# Altium PCB Board_LRA_Altium.pcbdoc
Units mm, origin at the board's own origin, x right, y up, seen from the top; angles counter-clockwise.
Board outline 54.78 x 49.37 mm, 2 copper layers (Top Layer, Bottom Layer); 19 components, 15 nets, 57 pads, 17 vias.
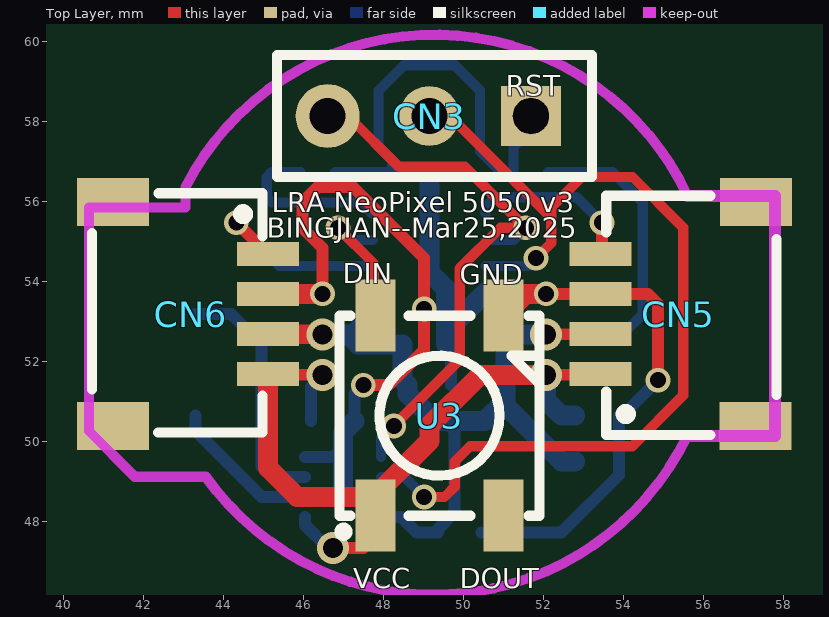
[diagram p0: Top Layer view]
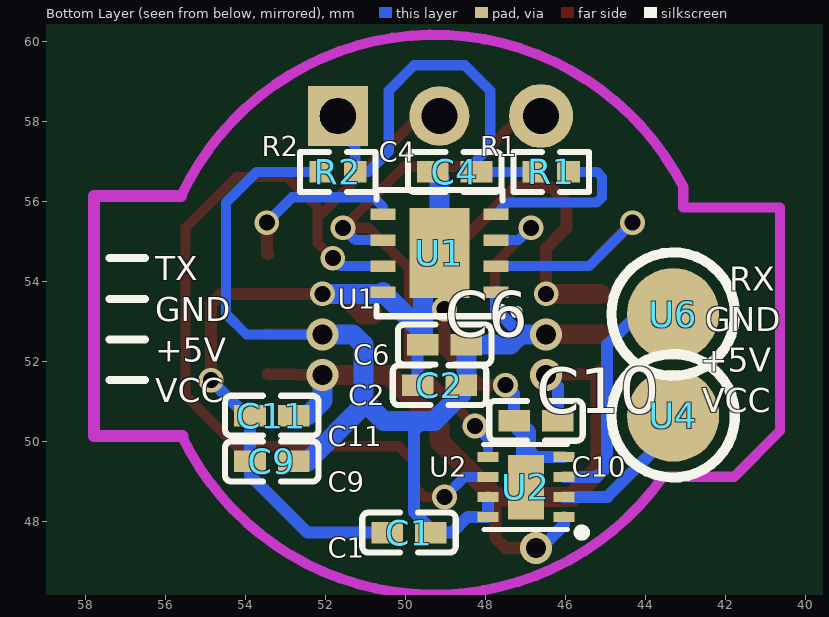
[diagram p1: Bottom Layer view, seen from below]

## Layer stack, top to bottom
Top Layer: signal copper (thickness not stored)
Dielectric: dielectric 0.32, FR-4, Dk 4.8
Bottom Layer: signal copper (thickness not stored)

## Board outline
80.177,25.4 25.4,25.4 25.4,74.771 80.177,74.771

## Components (designator, comment, footprint, x,y, rotation, side; value= is the part's Value field where it differs from the comment)
C1 "1uF" C0402 49.911,47.721 r0 bottom
C2 "100nF" C0402_NEW 49.149,51.404 r180 bottom
C4 "100nF" C0402_NEW 48.768,56.738 r0 bottom
C6 "C0402" C0402 49.022,52.42 r0 bottom
C9 "C0402" C0402 53.34,49.499 r0 bottom
C10 "C0402" C0402 46.736,50.515 r0 bottom
C11 "C0402" C0402 53.34,50.642 r0 bottom
CN3 "3 Pads Solder" 3PADS-JED 49.149,58.135 r270 top
CN5 "SM04B-SRSS-TB (LF)(SN)" CONN-SMD_4P-P1.00_SM04B-SRSS-TB-LF-SN 55.372,53.182 r90 top
CN6 "SM04B-SRSS-TB (LF)(SN)" CONN-SMD_4P-P1.00_SM04B-SRSS-TB-LF-SN 43.18,53.182 r270 top
R1 "300Ω" R0402 46.355,56.738 r0 bottom
R2 "10kΩ" R0402 51.689,56.738 r180 bottom
U1 "PIC16F18313-E/RF" DFN-8_L3.0-W3.0-P0.65-BL-EP 49.149,54.706 r270 bottom
U2 "DRV8837DSGR" WSON-8_L2.0-W2.0-P0.50-TL-EP 46.99,48.864 r180 bottom
U3 "LED-SMD_4P-L5.0-W5.0-TL-2" LED-SMD_4P-L5.0-W5.0-TL-2 49.403,50.642 r90 top
U4 "CONN-SMD_YTC1P-3015-01" CONN-SMD_YTC1P-3015-01 43.307,50.642 r0 bottom
U6 "CONN-SMD_YTC1P-3015-01" CONN-SMD_YTC1P-3015-01 43.307,53.182 r0 bottom
? "" ? 49.276,41.527 r0 top
? "" ? 63.622,53.119 r0 top

## Footprints (in the part's own frame and the unit in brackets; to place one, negate y for a bottom-side part, rotate by r counter-clockwise, add the part's x,y. Pads: shape width x height; smd on the part's side, far side on the other; paste and mask are expansions set on the pad)
3PADS-JED [mm]
  rect 1.5x1.5 hole 0.9 slot 0.9 at 0 deg paste+0 mask+0.102: 1(0,2.54)
  round 1.5 hole 0.9 paste+0 mask+0.102: 2(0,0)
  round 1.6 hole 0.9 paste+0 mask+0.102: 3(0,-2.54)
  silkscreen extent -1.52,-3.81 1.52,4.06
C0402 [mm]
  rect 0.79x0.54 smd paste-100 mask+0.051: 1(0.545,0) 2(-0.545,0)
  silkscreen extent -1.17,-0.5 1.17,0.5
C0402_NEW [mm]
  rect 0.79x0.54 smd paste-100 mask+0.051: 1(0.545,0) 2(-0.545,0)
  silkscreen extent -1.17,-0.5 1.17,0.5
CONN-SMD_4P-P1.00_SM04B-SRSS-TB-LF-SN [mm]
  rect 0.6x1.55 smd paste+0 mask+0.051: 1(-1.5,1.938) 2(-0.5,1.938) 3(0.501,1.938) 4(1.5,1.938)
  rect 1.2x1.8 smd paste+0 mask+0.051: 5(2.8,-1.938) 6(-2.8,-1.938)
  silkscreen extent -3.02,-2.46 2.96,1.8
CONN-SMD_YTC1P-3015-01 [mm]
  round 2.3 smd paste+0 mask+0.05: 1(0,0)
  silkscreen extent -1.54,-1.54 1.55,1.54
DFN-8_L3.0-W3.0-P0.65-BL-EP [mm]
  rect 0.28x0.625 smd paste+0 mask+0.051: 1(0.975,1.412) 2(0.325,1.412) 3(-0.325,1.412) 4(-0.975,1.412) 5(-0.975,-1.412) 6(-0.325,-1.412) 7(0.325,-1.412) 8(0.975,-1.412)
  rect 2.25x1.5 smd paste+0 mask+0.051: 9(0,0)
  silkscreen extent -1.58,-1.58 1.58,2.01
LED-SMD_4P-L5.0-W5.0-TL-2 [mm]
  rect 1.8x1 smd paste+0 mask+0.051: 1(2.5,-1.6) 2(2.5,1.6) 3(-2.5,1.6) 4(-2.5,-1.6)
  silkscreen extent -3,-2.5 2.5,2.5
R0402 [mm]
  rect 0.566x0.54 smd paste-100 mask+0.051: 1(0.433,0) 2(-0.433,0)
  silkscreen extent -0.94,-0.5 0.94,0.5
WSON-8_L2.0-W2.0-P0.50-TL-EP [mm]
  rect 0.521x0.25 smd paste+0 mask+0.051: 1(0.95,-0.75) 2(0.95,-0.25) 3(0.95,0.25) 4(0.95,0.75) 5(-0.95,0.75) 6(-0.95,0.25) 7(-0.95,-0.25) 8(-0.95,-0.75)
  rect 0.902x1.613 smd paste+0 mask+0.051: 9(0,-0.013)
  silkscreen extent -1.06,-1.22 1.47,1.06
? [mm]

## Via types
v1: diameter 0.62, hole 0.4, Top Layer to Bottom Layer, tented both sides, 12 vias
v2: diameter 0.8, hole 0.5, Top Layer to Bottom Layer, tented both sides, 5 vias

## Nets (pads, with @x,y where several pads share a name; then routed paths per layer and width w, separated by ;. In a path a pad name is that pad's centre, name@x,y a point inside that pad or via, vN(x,y) a via of type N, cw(c..) or ccw(c..) an arc to the next point about the centre after c; other vN are vias at no path point)
+5V: C1.2 C2.1 C6.2 C9.2 CN5.2 CN6.3 R2.2 U1.1 U2.7 U2.8 | length 28.5
  Top Layer w0.3: v2(52.07,52.674) CN5.2
  Top Layer w0.5: CN6.3 v2(46.482,52.674)
  Bottom Layer w0.254: v2(52.07,52.674) 53.975,52.674 54.483,53.182 54.483,55.976 53.721,56.738 R2.2
  Bottom Layer w0.3: 47.117,52.674 47.737,53.293 U1.1 ; U2.7 47.94,48.114 48.44,48.114 48.833,47.721 C1.2 ; C1.2 49.365,47.81 49.784,48.229 49.784,50.251 49.53,50.515
  Bottom Layer w0.5: v2(46.482,52.674) 47.117,52.674 47.371,52.42 C6.2 48.477,51.531 C2.1 48.604,51.187 49.276,50.515 50.546,50.515 51.054,51.023 51.054,52.42 51.308,52.674 v2(52.07,52.674) ; 51.054,50.896 52.451,49.499 C9.2
DIN: U1.3 U3.2 | length 3.6
  Top Layer w0.254: v1(46.863,55.341) 47.758,54.446 U3.2@47.758,53.164
  Bottom Layer w0.254: v1(46.863,55.341) 47.173,55.031 U1.3
DOUT: U3.4
GND: C1.1 C2.2 C4.1 C6.1 C9.1 C10.1 C11.1 CN5.3 CN6.2 U1.8 U1.9 U2.4 U2.9 U3.1 | length 38.4
  Top Layer w0.3: v1(46.482,53.69) 46.482,54.833 45.974,55.341 45.974,55.976 46.355,56.357 47.244,56.357 49.022,54.579 v1(49.022,53.309) 49.022,52.293 48.133,51.404 v1(47.498,51.404) ; v1(52.07,53.69) CN5.3 54.618,53.682 54.864,53.436 v1(54.864,51.531)
  Top Layer w0.5: CN6.2 v1(46.482,53.69) ; U3.1@50.813,53.177 51.049,53.177 51.562,53.69 v1(52.07,53.69)
  Bottom Layer w0.3: U2.4 46.744,49.614 46.99,49.86 ; C10.1 47.281,51.187 v1(47.498,51.404) ; v1(49.022,53.309) 49.496,53.309 49.567,53.238 ; C6.1 49.694,52.293 C2.2 ; C1.1 52.451,47.721 53.886,49.156 C9.1 ; C9.1 C11.1 53.975,50.642 v1(54.864,51.531)
  Bottom Layer w0.5: U2.9 46.99,50.224 C10.1 ; C4.1 49.149,56.574 U1.9 49.149,54.235 49.567,53.817 C6.1 49.567,52.737 U1.8 50.603,53.69 v1(52.07,53.69)
OUT1: U2.2 U4.1 | length 3.8
  Bottom Layer w0.3: U4.1 43.307,50.261 44.954,48.614 U2.2
OUT2: U2.3 U6.1 | length 6.2
  Bottom Layer w0.3: U6.1 44.196,53.182 44.958,52.42 44.958,49.372 45.216,49.114 U2.3
RA0: CN3.2 U1.7 U2.6 | length 24.4
  Top Layer w0.254: v1(49.022,48.61) 49.53,48.61 49.784,48.864 49.784,49.499 50.165,49.88 54.229,49.88 55.499,51.15 55.499,55.341 54.229,56.611 52.959,56.611 52.197,55.849 52.197,55.595 ; CN3.2 49.657,58.135 52.197,55.595 ; v1(51.816,54.579) 52.197,54.96 52.197,55.595
  Bottom Layer w0.254: U2.6 48.518,49.114 v1(49.022,48.61) ; U1.7 51.618,54.381 v1(51.816,54.579)
RA1: CN3.3 U1.6 U2.5 | length 14.8
  Top Layer w0.254: CN3.3 47.117,58.135 48.387,56.865 50.038,56.865 v1(51.562,55.341) 50.927,55.341 49.911,54.325 49.911,52.039 v1(48.26,50.388)
  Bottom Layer w0.254: U2.5 47.94,50.068 v1(48.26,50.388) ; U1.6 51.252,55.031 v1(51.562,55.341)
RST: R1.2 U1.4 | length 4.2
  Bottom Layer w0.254: R1.2 45.212,56.738 45.085,56.611 45.085,56.103 45.212,55.976 47.442,55.976 U1.4
RX: CN6.1 U1.2 | length 5
  Top Layer w0.3: v1(44.323,55.468) 44.332,55.468 CN6.1
  Bottom Layer w0.254: v1(44.323,55.468) 45.41,54.381 U1.2
S$9886: 
S$15369: 
SW: C4.2 CN3.1 R1.1 R2.1 | length 10.8
  Bottom Layer w0.254: R1.1 C4.2 ; C4.2 48.222,57.03 47.879,57.373 47.879,58.77 48.514,59.405 49.784,59.405 50.419,58.77 50.419,57.246 50.927,56.738 R2.1 ; R2.1 51.256,57.373 51.689,57.806 CN3.1
TX: CN5.4 U1.5 | length 4.2
  Top Layer w0.3: CN5.4@53.434,54.683 53.467,54.716 v1(53.467,55.468)
  Bottom Layer w0.254: U1.5 50.561,55.864 50.8,56.103 52.832,56.103 v1(53.467,55.468)
VCC: C10.2 C11.2 CN5.1 CN6.4 U2.1 U3.3 | length 19.9
  Top Layer w0.3: CN6.4 v2(46.482,51.658) ; v2(46.736,47.34) 47.498,47.34 47.752,47.594 U3.3@47.752,48.61 ; v2(52.07,51.658) CN5.1
  Top Layer w0.5: CN6.4 45.118,49.339 45.847,48.61 47.752,48.61 49.149,50.007 49.149,50.388 50.419,51.658 v2(52.07,51.658)
  Bottom Layer w0.3: U2.1 46.04,47.909 46.609,47.34 v2(46.736,47.34) ; C10.2 46.191,51.367 v2(46.482,51.658)
  Bottom Layer w0.5: v2(52.07,51.658) 52.07,51.023 52.451,50.642 C11.2
pads on no net: CN5.5 CN5.6 CN6.5 CN6.6

## Polygon pours and split planes (outlines as drawn)
GND on Bottom Layer (solid): 39.497,60.802 58.801,60.802 59.309,60.294 59.309,44.038 58.801,43.53 40.005,43.53 39.37,44.165
VCC on Top Layer (solid): 38.1,61.183 59.182,61.183 59.69,60.675 59.69,44.038 58.928,43.276 39.116,43.276 38.227,44.165

## Keep-outs
Keep-Out Layer:
  lines w0.254 net S$9886: 43.054,56.357 cw(c49.276,53.182) 55.608,56.131 ; 43.561,49.118 ccw(c49.276,53.182) 55.588,50.127

## Silkscreen, mask and mechanical layers (free items; w line width, h text height)
Top Overlay:
  text "RST" at 51.054,58.643 h0.51
  text "LRA NeoPixel 5050 v3" at 45.212,55.726 h0.5
  text "BINGJIAN--Mar25,2025" at 45.085,55.091 h0.5
  text "DIN" at 46.99,53.948 h0.5
  text "GND" at 49.911,53.929 h0.5
  text "VCC" at 47.244,46.328 h0.5
  text "DOUT" at 49.911,46.328 h0.5
Bottom Overlay:
  lines w0.2 net S$15369: 56.515,51.531 57.404,51.531 ; 56.515,52.547 57.404,52.547 ; 56.515,53.563 57.404,53.563 ; 56.515,54.579 57.404,54.579
  text "R1" at 48.133,57.123 h0.5
  text "R2" at 53.594,57.123 h0.5
  text "C4" at 50.673,56.996 h0.5
  text "TX" at 56.261,54.025 h0.6
  text "RX" at 41.91,53.771 h0.6
  text "U1" at 51.689,53.313 h0.5
  text "GND" at 56.261,53.009 h0.6
  text "GND" at 42.499,52.755 h0.6
  text "+5V" at 56.261,51.993 h0.6
  text "C6" at 51.308,51.916 h0.5
  text "+5V" at 42.635,51.739 h0.6
  text "VCC" at 56.261,50.977 h0.6
  text "C2" at 51.435,50.9 h0.5
  text "VCC" at 42.581,50.723 h0.6
  text "C11" at 51.943,49.884 h0.5
  text "C10" at 45.847,49.122 h0.5
  text "U2" at 49.403,49.122 h0.5
  text "C9" at 51.943,48.741 h0.5
  text "C1" at 51.943,47.09 h0.5